# Altium PCB WorkLamp_led.PcbDoc
Units mm, origin at the board's own origin, x right, y up, seen from the top; angles counter-clockwise.
Board outline 34.04 x 34.04 mm, 2 copper layers (Top Layer, Bottom Layer), stack 1.571 mm thick; 13 components, 70 nets, 40 pads, 96 vias.
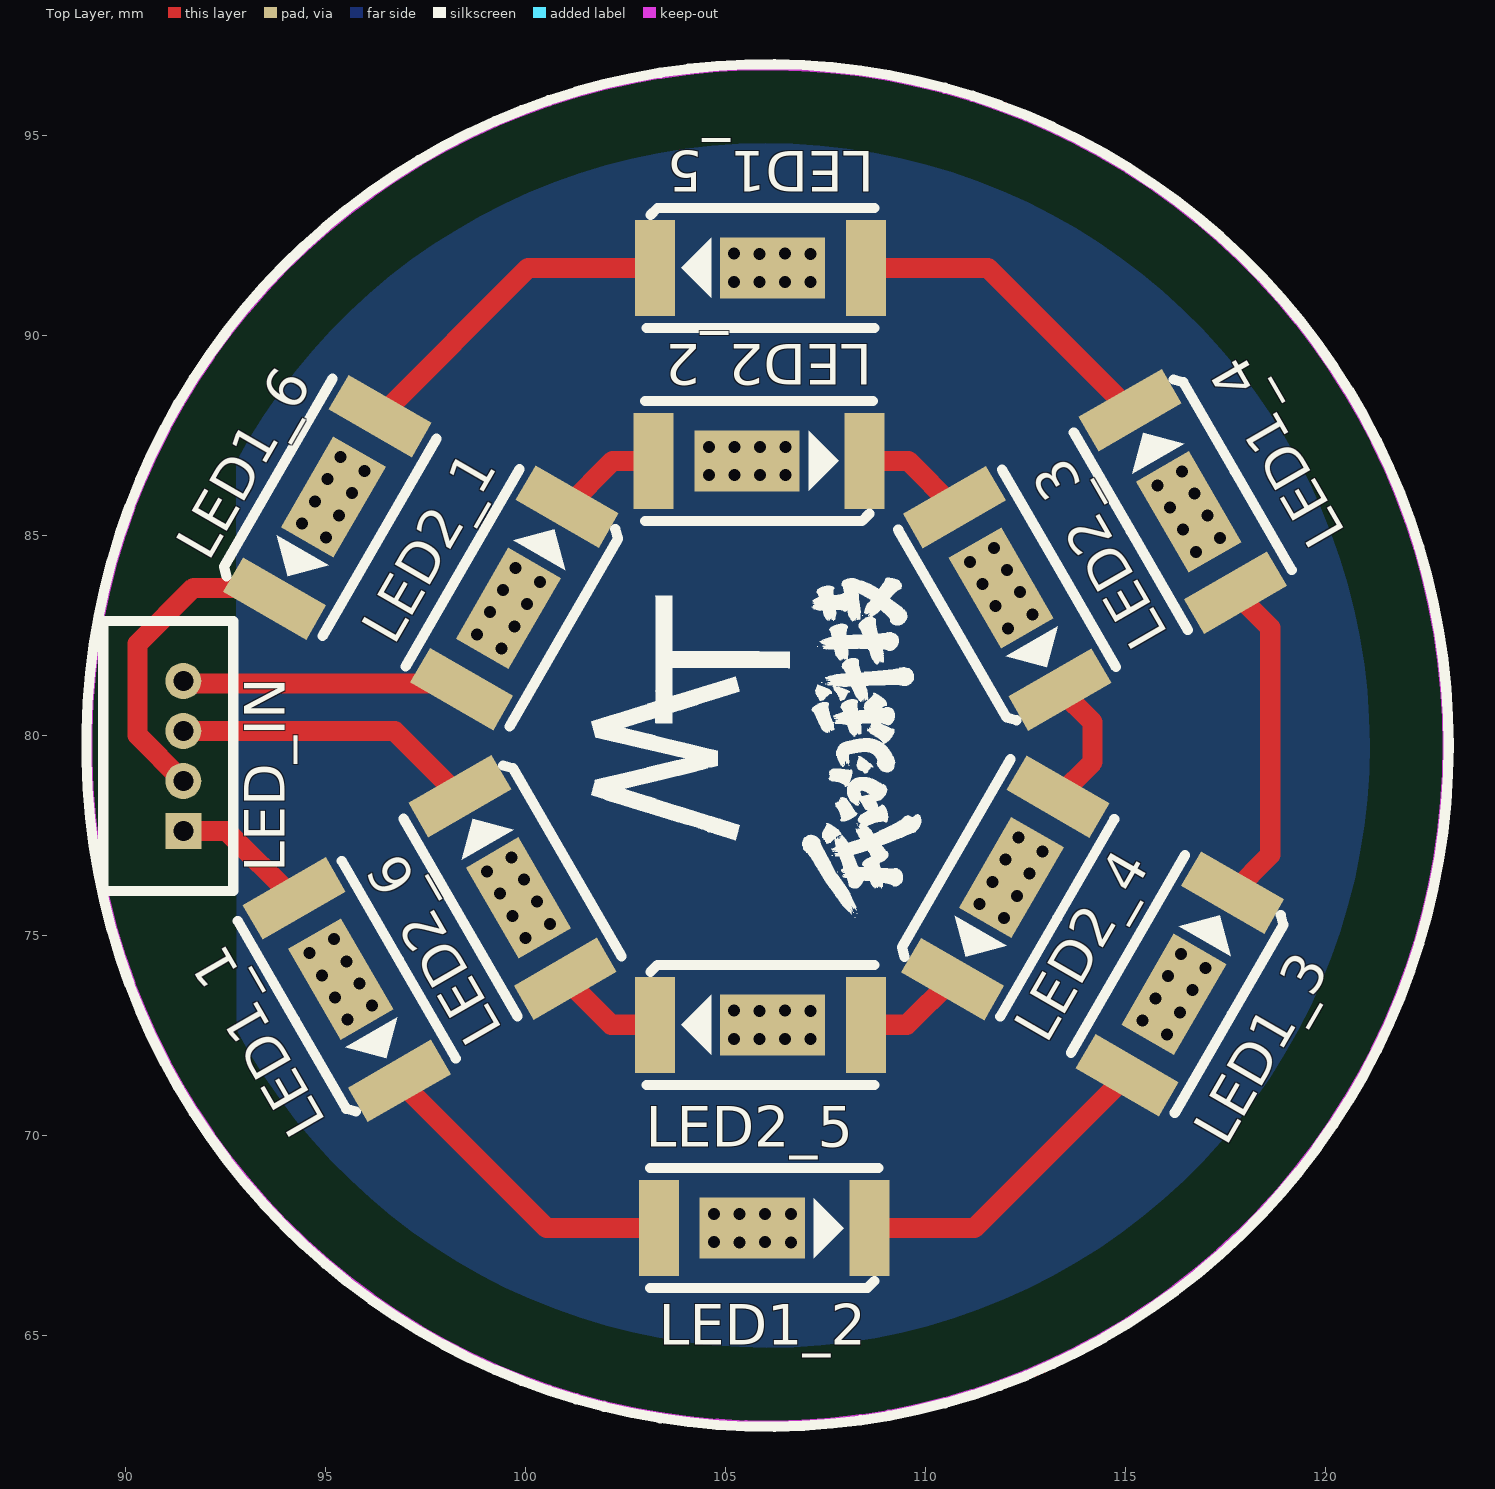
[diagram p0: Top Layer view]
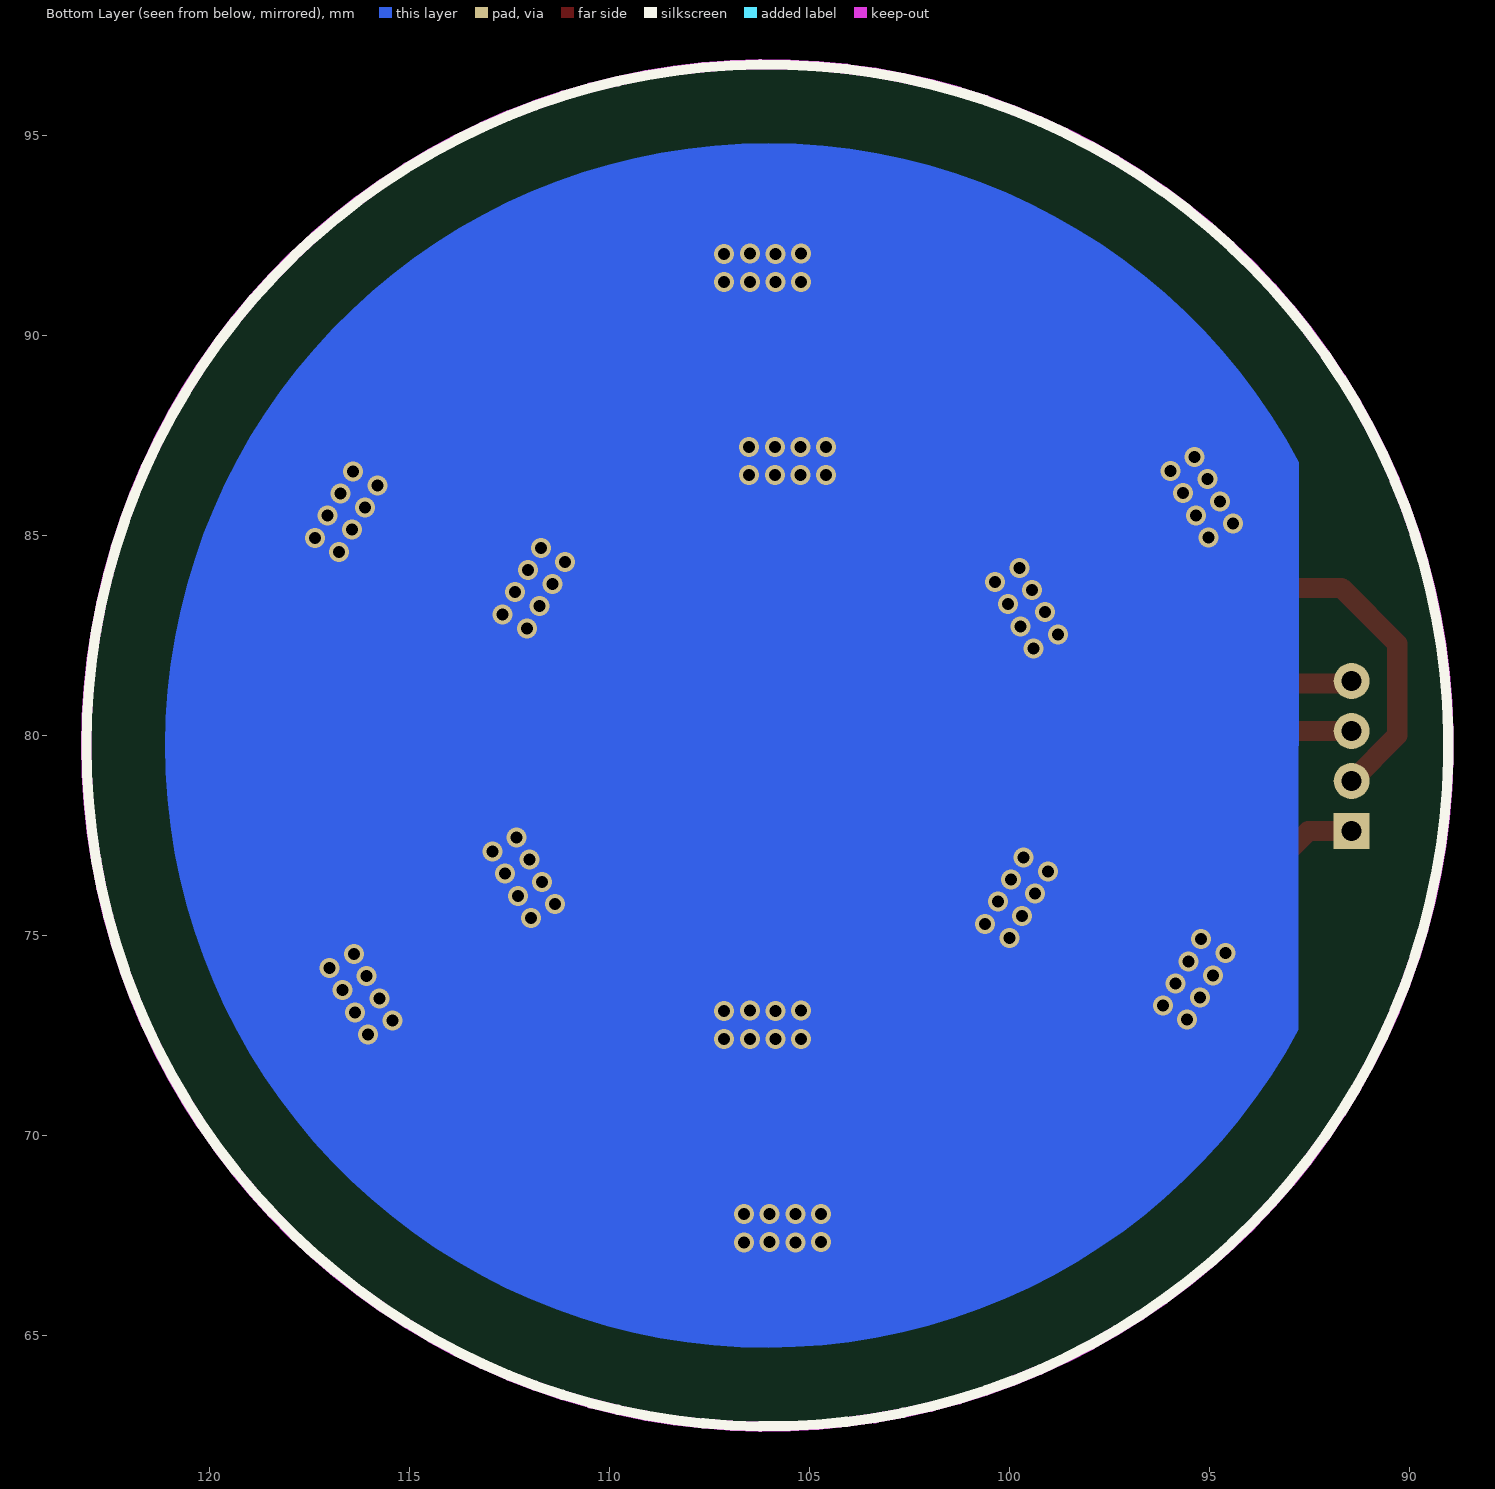
[diagram p1: Bottom Layer view, seen from below]
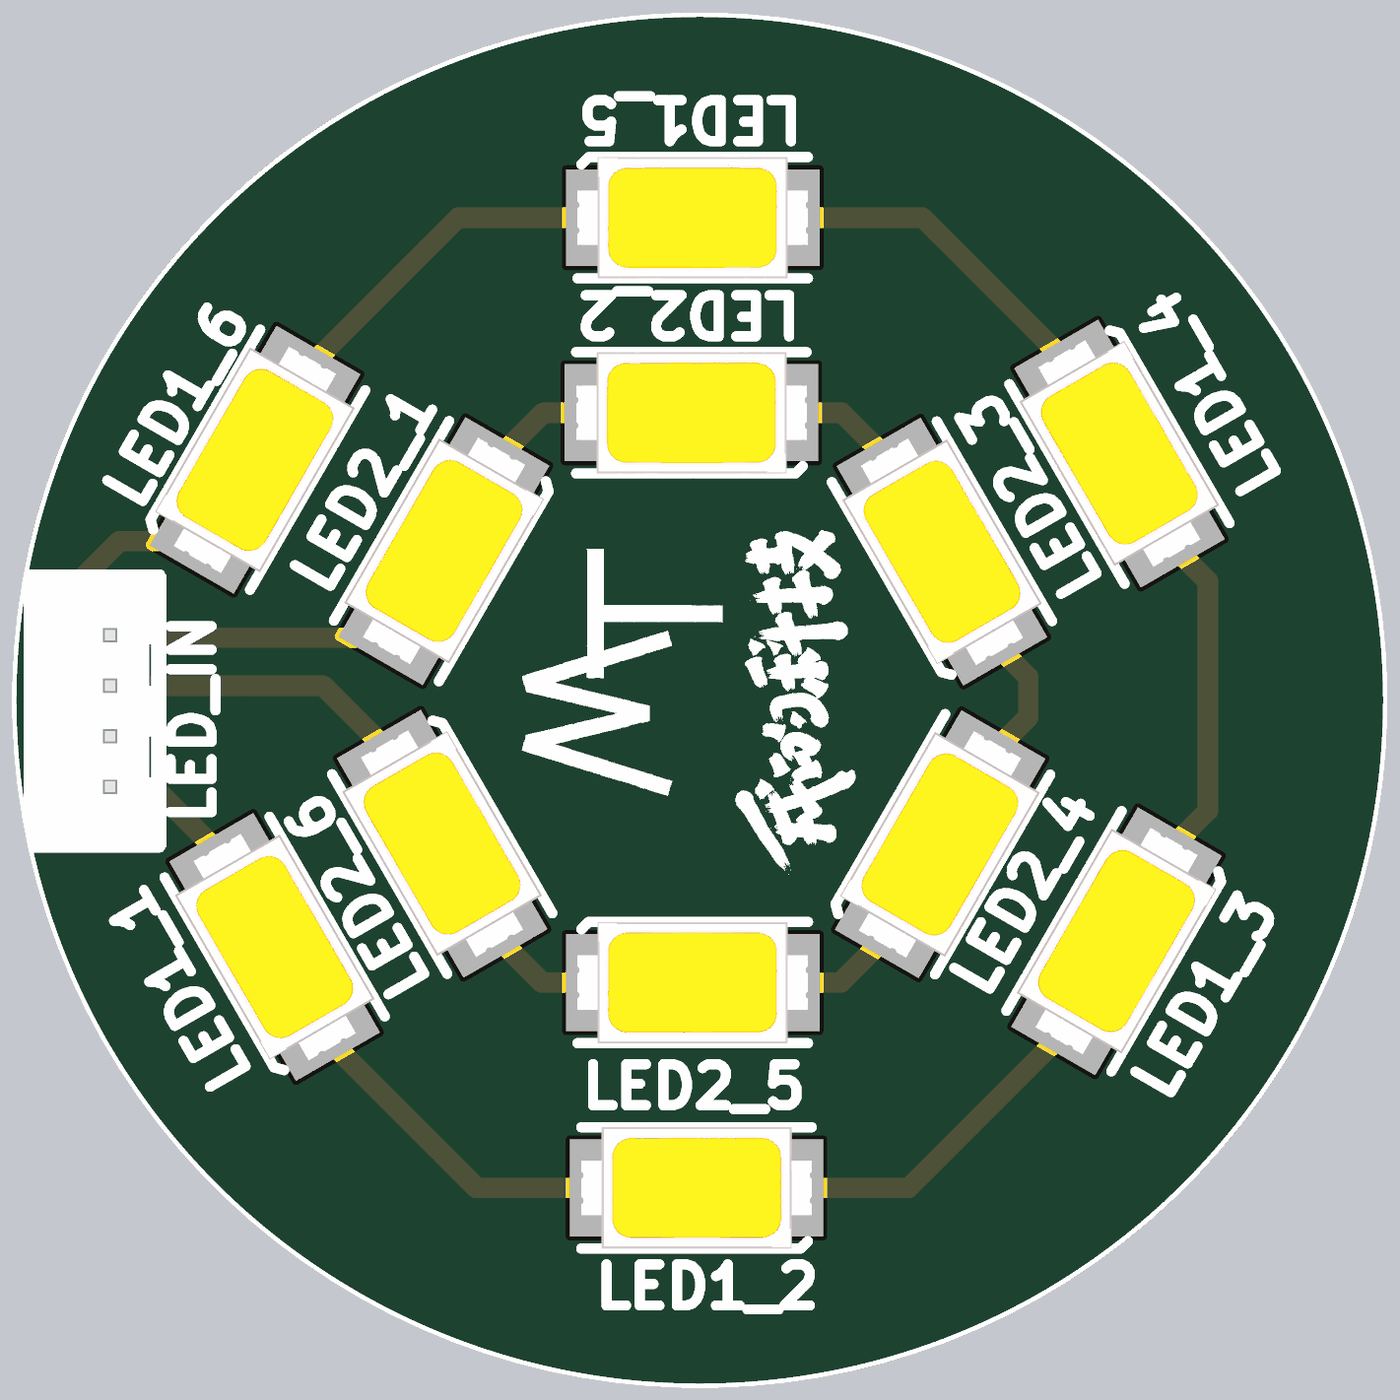
[diagram p2: 3D render of the assembled board from above, using the file's embedded part models]

## Layer stack, top to bottom
Top Solder: solder mask 0.0102, Solder Resist, Dk 3.5
Top Layer: signal copper 0.0356
Dielectric 1: dielectric 1.5, FR-4, Dk 4.8
Bottom Layer: signal copper 0.0356
Bottom Solder: solder mask 0.0102, Solder Resist, Dk 3.5

## Board outline
89.027,79.756 ccw(c106.045,79.756) 106.045,62.738 ccw(c106.045,79.756) 123.063,79.756 ccw(c106.045,79.756) 106.045,96.774 ccw(c106.045,79.756)

## Design rules (kind name [scope] priority, off if disabled: settings)
Clearance Clearance_4 [InNamedPolygon('GND_L01_P012')] p1: gap=0.254 ignorepadtopadclearanceinfootprint=FALSE except(0: Arc-Hole Track-Hole SMDPad-Hole THPad-Hole Via-Hole Fill-Hole Poly-Hole Region-Hole Text-Hole)
Clearance Clearance_3 [InNamedPolygon('GND_L01_P012')] p2: gap=0.254 ignorepadtopadclearanceinfootprint=FALSE
Clearance Clearance_2 [InNamedPolygon('NONET_L01_P010')] p3: gap=0.254 ignorepadtopadclearanceinfootprint=FALSE except(0: Arc-Hole Track-Hole SMDPad-Hole THPad-Hole Via-Hole Fill-Hole Poly-Hole Region-Hole Text-Hole)
Clearance Clearance_1 [InNamedPolygon('GND_L02_P008')] p4: gap=0.254 ignorepadtopadclearanceinfootprint=FALSE
Clearance [All] p5: gap=0.102 ignorepadtopadclearanceinfootprint=FALSE
ComponentClearance [All] p1 off: gap=0.254 collisioncheckmode=3 verticalgap=0.254 showdistances=FALSE
DiffPairsRouting [All] p1: maxlimit=0.254 minlimit=0.152 mostfreqgap=0.152 toplayer_minwidth=0.381 toplayer_maxwidth=0.381 toplayer_prefwidth=0.381 bottomlayer_minwidth=0.381 bottomlayer_maxwidth=0.381 bottomlayer_prefwidth=0.381 maxuncoupledlength=12.7
MinimumSolderMaskSliver [All] p1: minsoldermaskwidth=0.102
PolygonConnect [All] p1: connectstyle=Relief reliefconductorwidth=0.254 reliefentries=4 polygonreliefangle="90 Angle" airgapwidth=0.254
RoutingVias [All] p1: holewidth=0.3 width=0.9 viastyle="Through Hole" minholewidth=0.3 minwidth=0.9 maxholewidth=0.711 maxwidth=1.27
SilkToSilkClearance [All] p1 off: silktosilkclearance=0.254
SilkToSolderMaskClearance [IsPad] p1 off: minsilkscreentomaskgap=0.254 clearancetoexposedcopper=TRUE
SolderMaskExpansion [All] p1: expansion=0.102
Width [All] p1: maxlimit=0.508 minlimit=0.102 preferedwidth=0.254 minimp=50.000000 maximp=50.000000 favimp=50.000000
25 further rules are at their usual default settings.

## Components (designator, comment, footprint, x,y, rotation, side; value= is the part's Value field where it differs from the comment)
LED1_1 "LED_5730" LED_5730 96.845,71.37 r120 top
LED1_2 "LED_5730" LED_5730 108.599,67.691 r180 top
LED1_3 "LED_5730" LED_5730 117.673,76.075 r240 top
LED1_4 "LED_5730" LED_5730 115.11,88.14 r300 top
LED1_5 "LED_5730" LED_5730 103.237,91.694 r0 top
LED1_6 "LED_5730" LED_5730 93.726,83.425 r60 top
LED2_1 "LED_5730" LED_5730 101.036,85.727 r240 top
LED2_2 "LED_5730" LED_5730 108.472,86.868 r180 top
LED2_3 "LED_5730" LED_5730 113.355,81.151 r120 top
LED2_4 "LED_5730" LED_5730 110.673,73.912 r60 top
LED2_5 "LED_5730" LED_5730 103.237,72.771 r0 top
LED2_6 "LED_5730" LED_5730 98.354,78.488 r300 top
LED_IN "SH1.25mm_4P" SH1.25MM_4P 91.44,81.367 r270 top

## Footprints (in the part's own frame and the unit in brackets; to place one, negate y for a bottom-side part, rotate by r counter-clockwise, add the part's x,y. Pads: shape width x height; smd on the part's side, far side on the other; paste and mask are expansions set on the pad)
LED_5730 [mm]
  rect 2.63x1.52 smd: 0(2.935,0)
  rect 1x2.4 smd: 1(0,0) 2(5.27,0)
  silkscreen extent -0.21,-1.5 5.49,1.5, body extent -0.22,-1.5 5.48,1.5, height 0.81
SH1.25MM_4P [mm]
  rect 0.9x0.9 hole 0.5: 1(3.75,0)
  round 0.9 hole 0.5: 2(2.5,0) 3(1.25,0) 4(0,0)
  silkscreen extent -1.5,-2 5.25,1.25, body extent -1.5,-1.91 5.25,1.41, height 4.22

## Part data
LED1_1 LED1_2 LED1_3 LED1_4 LED1_5 LED1_6 LED2_1 LED2_2 LED2_3 LED2_4 LED2_5 LED2_6: "LED 5730"

## Via types
v1: diameter 0.5, hole 0.3, Top Layer to Bottom Layer, 96 vias

## Nets (pads, with @x,y where several pads share a name; then routed paths per layer and width w, separated by ;. In a path a pad name is that pad's centre, name@x,y a point inside that pad or via, vN(x,y) a via of type N, cw(c..) or ccw(c..) an arc to the next point about the centre after c; other vN are vias at no path point)
3V3: 
+5: 
BEEP: 
BOOT0: 
BOOT1: 
EA: 
EB: 
EK: 
GND: 
NetBEEP_1: 
NetBEEP_2: 
NetC16_1: 
NetC19_1: 
NetD1_1: 
NetD2_1: 
NetE1_1: 
NetE1_3: 
NetLED1_1_1: LED1_1.1 LED1_2.2 | length 8
  Top Layer w0.508: LED1_1.1 100.524,67.691 LED1_2.2
NetLED1_1_2: LED1_1.2 LED_IN.1 | length 3.5
  Top Layer w0.508: LED_IN.1 92.527,77.617 LED1_1.2
NetLED1_2_1: LED1_2.1 LED1_3.2 | length 8
  Top Layer w0.508: LED1_2.1 111.218,67.691 LED1_3.2
NetLED1_3_1: LED1_3.1 LED1_4.2 | length 8.3
  Top Layer w0.508: LED1_3.1 118.618,77.02 118.618,82.703 LED1_4.2
NetLED1_4_1: LED1_4.1 LED1_5.2 | length 8.1
  Top Layer w0.508: LED1_5.2 111.556,91.694 LED1_4.1
NetLED1_5_1: LED1_5.1 LED1_6.2 | length 8.4
  Top Layer w0.508: LED1_6.2 100.066,91.694 LED1_5.1
NetLED1_6_1: LED1_6.1 LED_IN.2 | length 8
  Top Layer w0.508: LED_IN.2 90.297,80.01 90.297,82.296 91.694,83.693 93.458,83.693 LED1_6.1
NetLED2_1_1: LED2_1.1 LED2_2.2 | length 2.6
  Top Layer w0.508: LED2_1.1 102.177,86.868 LED2_2.2
NetLED2_1_2: LED2_1.2 LED_IN.4 | length 7
  Top Layer w0.508: LED_IN.4@91.44,81.305 98.258,81.305 LED2_1.2
NetLED2_2_1: LED2_2.1 LED2_3.2 | length 2.7
  Top Layer w0.508: LED2_2.1 109.567,86.868 LED2_3.2
NetLED2_3_1: LED2_3.1 LED2_4.2 | length 3.4
  Top Layer w0.508: LED2_4.2 114.173,79.341 114.173,80.333 LED2_3.1
NetLED2_4_1: LED2_4.1 LED2_5.2 | length 2.6
  Top Layer w0.508: LED2_5.2 109.532,72.771 LED2_4.1
NetLED2_5_1: LED2_5.1 LED2_6.2 | length 2.7
  Top Layer w0.508: LED2_6.2 102.142,72.771 LED2_5.1
NetLED2_6_1: LED2_6.1 LED_IN.3 | length 7.6
  Top Layer w0.508: LED_IN.3 96.725,80.117 LED2_6.1
NetLED_OUT_2: 
NetLED_OUT_3: 
NetMOS1_1: 
NetR7_2: 
NetR8_2: 
NRST: 
OLED_D/C: 
OLED_RES: 
OSCIN: 
OSCOUT: 
PA6: 
PA8: 
PA15: 
PB3: 
PB4: 
PB5: 
PB9: 
PB12: 
PB13: 
PB14: 
PB15: 
PC13: 
PC14: 
PC15: 
PWM1: 
PWM2: 
SCL: 
SDA: 
SPI_CLK: 
SPI_CS: 
SPI_MOSI: 
SWCLK: 
SWDIO: 
TK: 
U1_RX: 
U1_TX: 
USB_D+: 
USB_D-: 
VBAT: 
pads on no net: LED1_1.0 LED1_2.0 LED1_3.0 LED1_4.0 LED1_5.0 LED1_6.0 LED2_1.0 LED2_2.0 LED2_3.0 LED2_4.0 LED2_5.0 LED2_6.0
copper on no net:
  other v1: 104.709,67.341 105.349,67.336 105.989,67.341 106.629,67.336 104.709,68.041 105.349,68.041 105.989,68.041 106.629,68.041 105.207,72.421 105.847,72.421 106.487,72.421 107.127,72.421 116.031,72.531 115.424,72.881 95.552,72.899 116.355,73.083 105.207,73.126 105.847,73.121 106.487,73.126 107.127,73.121 96.163,73.251 115.744,73.435 95.236,73.456 116.671,73.639 95.843,73.806 116.064,73.989 94.912,74.008 116.995,74.191 95.523,74.36 116.384,74.544 94.596,74.564 95.203,74.914 99.996,74.944 100.603,75.294 111.962,75.443 99.676,75.498 111.351,75.796 100.287,75.851 112.282,75.998 99.356,76.052 111.675,76.348 99.963,76.402 112.602,76.552 99.036,76.607 111.991,76.904 99.647,76.959 112.922,77.106 112.315,77.456 99.394,82.183 98.787,82.533 112.062,82.68 99.718,82.735 112.673,83.032 99.107,83.087 111.746,83.237 100.034,83.291 112.353,83.587 99.427,83.641 111.422,83.788 100.358,83.843 112.033,84.141 99.747,84.196 111.106,84.345 116.752,84.596 111.713,84.695 117.359,84.946 95.014,84.956 116.432,85.15 94.404,85.309 117.043,85.503 95.334,85.51 116.112,85.704 94.728,85.86 95.654,86.065 116.719,86.054 115.792,86.259 95.044,86.417 104.582,86.518 105.222,86.513 105.862,86.518 106.502,86.513 95.974,86.619 116.403,86.611 95.368,86.969 104.582,87.218 105.222,87.218 105.862,87.218 106.502,87.218 105.207,91.344 105.847,91.344 106.487,91.344 107.127,91.344 105.207,92.049 105.847,92.044 106.487,92.049 107.127,92.044

## Keep-outs
Top Layer:
  circle w0.254: c106.045,79.756 r17.005
Bottom Layer:
  circle w0.254: c106.045,79.756 r17.031

## Other copper
Bottom Layer:
  region: 92.774,72.65 ccw(c106.045,79.756) 92.762,86.84
  region: 106.299,96.647

## Silkscreen, mask and mechanical layers (free items; w line width, h text height)
Top Overlay:
  drawing of 3045 lines, arcs and shapes, not listed
Bottom Overlay:
  circle w0.254: c106.045,79.756 r17.023
Bottom Solder:
  region: 92.774,72.65 ccw(c106.045,79.756) 92.762,86.84
  lines w0.254: 92.762,72.644 92.762,86.84 cw(c106.045,79.756) 92.774,72.65
Mechanical 1:
  circle w0.254: c106.045,79.756 r17.018